# EAGLE board teensyMotors02_upSwitch_LED_SX (EAGLE 9.5.2)
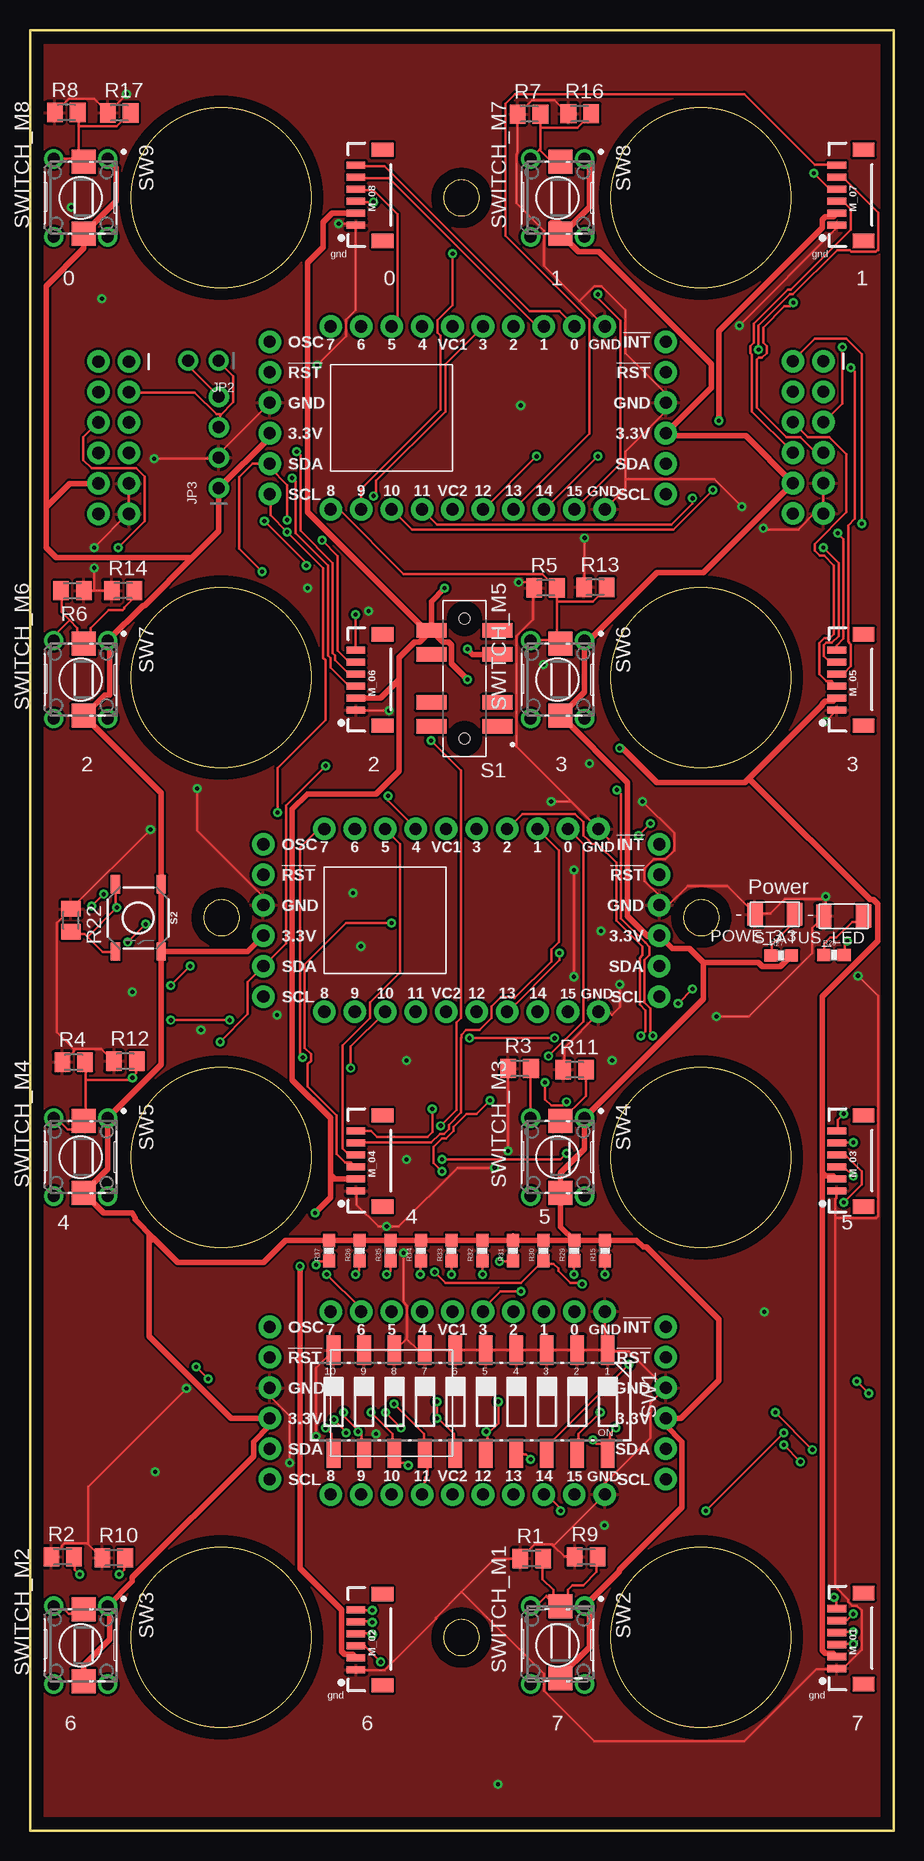
[diagram p0: board, top side]
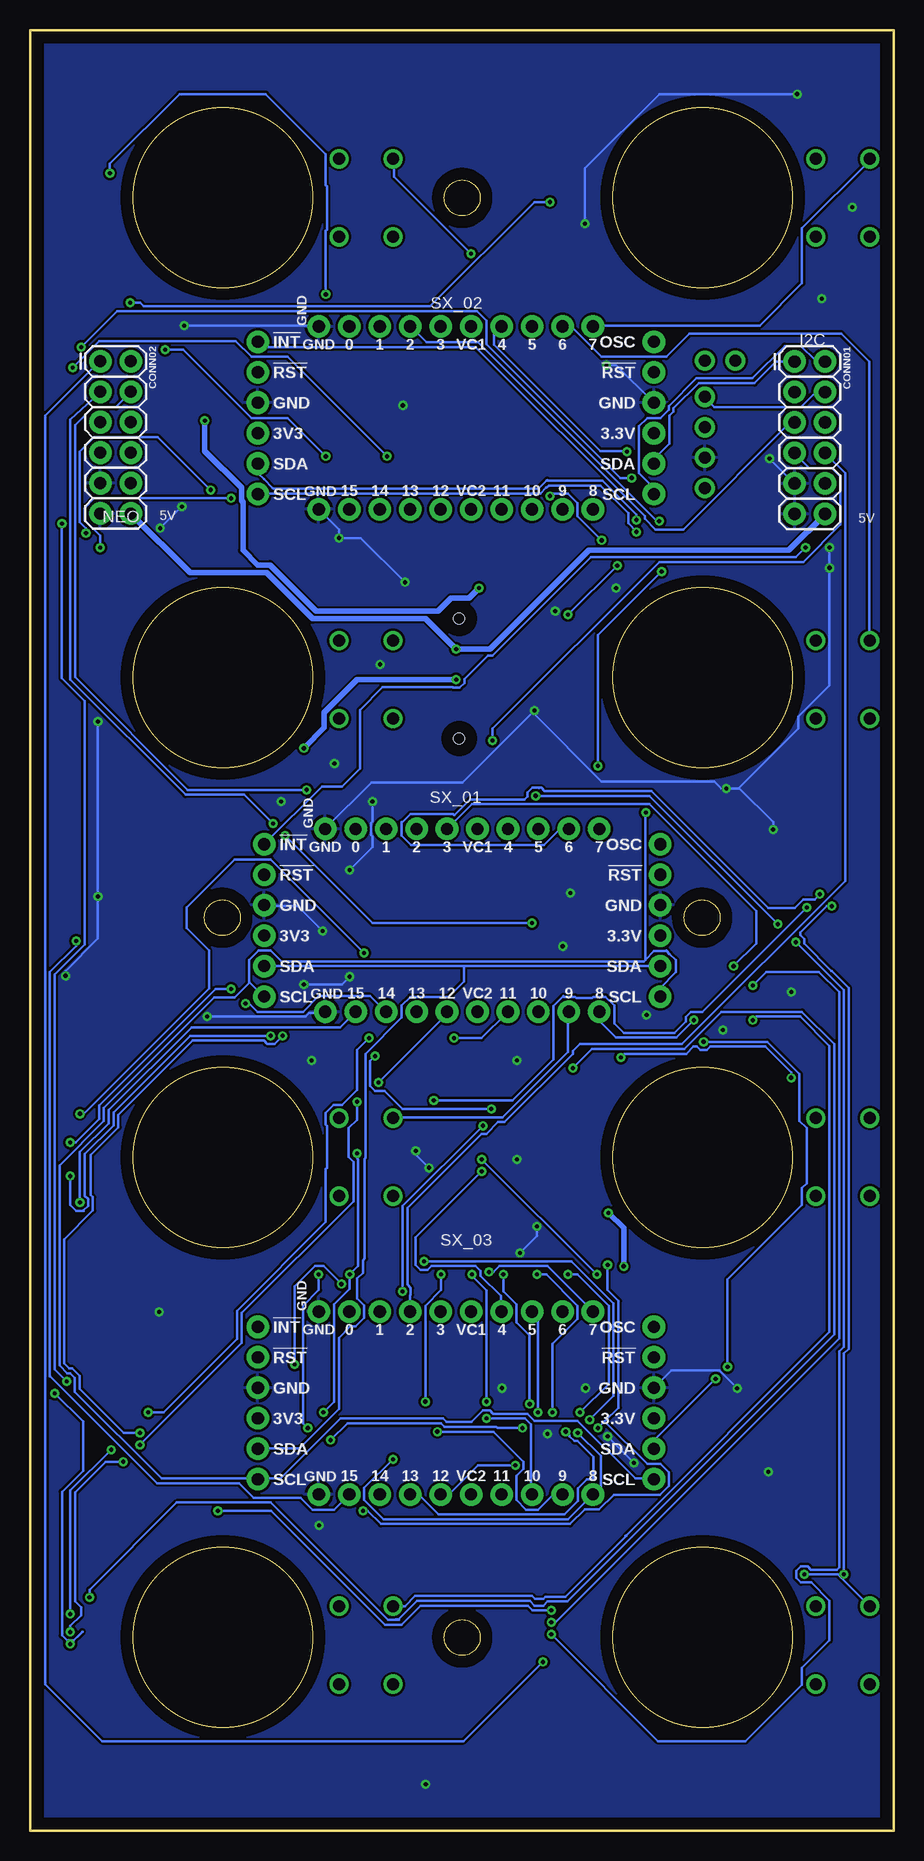
[diagram p1: board, bottom side, seen from below]

Size 72.01 x 150.09 mm. Coordinates in mm from the lower left corner, seen from the top.
Outline: 35.97,14.59 arc180 35.97,17.59 arc180 35.97,14.59
Outline: 15.97,74.59 arc180 15.97,77.59 arc180 15.97,74.59
Outline: 35.97,134.59 arc180 35.97,137.59 arc180 35.97,134.59
Outline: 55.97,74.59 arc180 55.97,77.59 arc180 55.97,74.59
Outline: 72.01,150.09 72.01,0 0,0 0,150.09 72.01,150.09
Outline: circle at 55.94,136.11 radius 7.49
Outline: circle at 55.94,96.11 radius 7.49
Outline: circle at 55.94,56.11 radius 7.49
Outline: circle at 55.94,16.11 radius 7.49
Outline: circle at 15.94,16.11 radius 7.49
Outline: circle at 15.94,56.11 radius 7.49
Outline: circle at 15.94,96.11 radius 7.49
Outline: circle at 15.94,136.11 radius 7.49
Copper layers (1*16): Top 0.035mm / dielectric 1.5mm / Bottom 0.035mm
Design rules "default": minimum track width 6mil, minimum drill 0.35mm, track to track 6mil, track to pad 6mil, pad to pad 6mil, via to via 6mil, smd to smd 6mil, copper to edge 40mil, drill to drill 6mil, minimum pad ring 10mil, minimum via ring 8mil, stop-mask expansion 4mil, vias tented up to drill 0mil, thermal gap 10mil
Net classes: 0 default: width 0.2 mm, clearance 0.2 mm; 1 gnd: width 0.2 mm, clearance 0.2 mm; 2 3v: width 0.45 mm, clearance 0.2 mm; 4 5v: width 0.45 mm, clearance 0.2 mm

## Footprints (pad centres in the part's own frame; a part is rotated, then mirrored left to right if it is on the bottom)
2X6 = drill 1.016 pad 1.88: 1 0,0; 2 0,2.54; 3 2.54,0; 4 2.54,2.54; 5 5.08,0; 6 5.08,2.54; 7 7.62,0; 8 7.62,2.54; 9 10.16,0; 10 10.16,2.54; 11 12.7,0; 12 12.7,2.54
1X02_ROUND = drill 1 pad 1.676: 1 -1.27,0; 2 1.27,0
1X04_ROUND = drill 1 pad 1.676: 1 -3.81,0; 2 -1.27,0; 3 1.27,0; 4 3.81,0
1X06-1MM = smd 0.6 x 1.55: 1 -2.54,1.27; 2 -1.54,1.27; 3 -0.54,1.27; 4 0.46,1.27; 5 1.46,1.27; 6 2.46,1.27 | smd 1.2 x 1.8: P$1 -3.84,-0.955; P$2 3.76,-0.955
LED1206FAB = smd 1.27 x 1.905: 1 -1.651,0; 2 1.651,0
M0805 = smd 1.3 x 1.6: 1 -0.95,0; 2 0.95,0
0603-RES = smd 1.1 x 1: 1 -0.85,0; 2 0.85,0
SW_JS207011SCQNR = smd 2.5 x 1.2: 1 -2.75,4; 2 -2.75,2; 3 -2.75,-2; 4 -2.75,-4; 5 2.75,4; 6 2.75,2; 7 2.75,-2; 8 2.75,-4 | hole 0.9: 0,5; 0,-5
TACTILE_SWITCH_SMD_5.2MM = smd 1.524 x 0.762: 1 -2.794,1.905; 2 2.794,1.905; 3 -2.794,-1.905; 4 2.794,-1.905
CTS-219-10 = smd 1.13 x 2.44: 1 -11.43,-4.3; 2 -8.89,-4.3; 3 -6.35,-4.3; 4 -3.81,-4.3; 5 -1.27,-4.3; 6 1.27,-4.3; 7 3.81,-4.3; 8 6.35,-4.3; 9 8.89,-4.3; 10 11.43,-4.3; 11 11.43,4.3; 12 8.89,4.3; 13 6.35,4.3; 14 3.81,4.3; 15 1.27,4.3; 16 -1.27,4.3; 17 -3.81,4.3; 18 -6.35,4.3; 19 -8.89,4.3; 20 -11.43,4.3
B3F-1000 = drill 1 pad 1.6: 1 -3.25,2.25; 2 3.25,2.25; 3 -3.25,-2.25; 4 3.25,-2.25
DTSM-3 = smd 2 x 2: 1 -3,0; 2 3,0
SX1509_HOLE = drill 1.016 pad 1.88: 0 -7.62,7.62; 1 -7.62,5.08; 2 -7.62,2.54; 3 -7.62,0; 3.3V 1.27,-17.78; 3.3V_2 1.27,15.24; 4 -7.62,-5.08; 5 -7.62,-7.62; 6 -7.62,-10.16; 7 -7.62,-12.7; 8 7.62,-12.7; 9 7.62,-10.16; 10 7.62,-7.62; 11 7.62,-5.08; 12 7.62,0; 13 7.62,2.54; 14 7.62,5.08; 15 7.62,7.62; GND -1.27,-17.78; GND_1 7.62,10.16; GND_2 -7.62,10.16; GND_3 -1.27,15.24; INT -6.35,15.24; OSC -6.35,-17.78; RST -3.81,-17.78; RST_2 -3.81,15.24; SCL 6.35,-17.78; SCL_2 6.35,15.24; SDA 3.81,-17.78; SDA_2 3.81,15.24; VC2 7.62,-2.54; VCC1 -7.62,-2.54

## Placement (x,y rotation side)
CONN01  2X6 FEMALE  [2X6]  8.25,122.45 270 bottom
CONN02  2X6 FEMALE  [2X6]  66.15,122.48 270 bottom
JP2  [1X02_ROUND]  14.45,122.53 180 top
JP3  [1X04_ROUND]  15.75,115.7 90 top
M_01  [1X06-1MM]  68.54,16.05 90 top
M_02  [1X06-1MM]  28.44,15.95 90 top
M_03  [1X06-1MM]  68.54,55.85 90 top
M_04  [1X06-1MM]  28.44,55.85 90 top
M_05  [1X06-1MM]  68.54,95.95 90 top
M_06  [1X06-1MM]  28.44,95.95 90 top
M_07  [1X06-1MM]  68.54,136.35 90 top
M_08  [1X06-1MM]  28.44,136.35 90 top
POWE_3.3  LEDFAB1206  [LED1206FAB]  62.1,76.38 180 top
R1  10k  [M0805]  41.83,22.67 0 top
R2  10k  [M0805]  2.73,22.83 0 top
R3  10k  [M0805]  40.82,63.54 0 top
R4  10K  [M0805]  3.64,64.05 0 top
R5  10k  [M0805]  42.98,103.58 0 top
R6  10k  [M0805]  3.54,103.35 180 top
R7  10k  [M0805]  41.61,143.08 0 top
R8  10k  [M0805]  3.03,143.21 0 top
R9  10K  [M0805]  46.38,22.81 0 top
R10  10K  [M0805]  6.99,22.73 0 top
R11  10K  [M0805]  45.42,63.42 0 top
R12  10K  [M0805]  7.95,64.13 0 top
R13  10K  [M0805]  47.14,103.63 0 top
R14  10K  [M0805]  7.77,103.35 0 top
R15  10K  [0603-RES]  47.93,48.35 90 top
R16  10K  [M0805]  45.85,143.1 0 top
R17  10K  [M0805]  7.44,143.18 0 top
R22  10K  [M0805]  3.41,75.88 270 top
R27  500  [0603-RES]  62.64,72.95 0 top
R28  500  [0603-RES]  67.03,73 0 top
R29  10K  [0603-RES]  45.38,48.35 90 top
R30  10K  [0603-RES]  42.82,48.35 90 top
R31  10K  [0603-RES]  40.27,48.35 90 top
R32  10K  [0603-RES]  37.71,48.35 90 top
R33  10K  [0603-RES]  35.16,48.35 90 top
R34  10K  [0603-RES]  32.61,48.35 90 top
R35  10K  [0603-RES]  30.05,48.35 90 top
R36  10K  [0603-RES]  27.5,48.35 90 top
R37  10K  [0603-RES]  24.94,48.35 90 top
S1  JS207011SCQNR  [SW_JS207011SCQNR]  36.22,96.04 180 top
S2  [TACTILE_SWITCH_SMD_5.2MM]  9.03,76.08 270 top
STATUS_LED  LEDFAB1206  [LED1206FAB]  67.84,76.23 180 top
SW1  219-10  [CTS-219-10]  36.74,35.74 180 top
SW2  B3F-1000  [B3F-1000]  43.99,15.46 270 top
SW3  B3F-1000  [B3F-1000]  4.23,15.46 270 top
SW4  B3F-1000  [B3F-1000]  43.99,56.13 270 top
SW5  B3F-1000  [B3F-1000]  4.23,56.13 270 top
SW6  B3F-1000  [B3F-1000]  43.99,95.94 270 top
SW7  B3F-1000  [B3F-1000]  4.23,95.94 270 top
SW8  B3F-1000  [B3F-1000]  43.99,136.09 270 top
SW9  B3F-1000  [B3F-1000]  4.23,136.09 270 top
SWITCH_M1  DTSM-3  [DTSM-3]  44.24,15.7 90 top
SWITCH_M2  DTSM-3  [DTSM-3]  4.48,15.46 90 top
SWITCH_M3  DTSM-3  [DTSM-3]  44.24,56.13 90 top
SWITCH_M4  DTSM-3  [DTSM-3]  4.48,56.13 90 top
SWITCH_M5  DTSM-3  [DTSM-3]  44.24,95.94 90 top
SWITCH_M6  DTSM-3  [DTSM-3]  4.48,95.94 90 top
SWITCH_M7  DTSM-3  [DTSM-3]  44.24,136.09 90 top
SWITCH_M8  DTSM-3  [DTSM-3]  4.48,136.09 90 top
U$1  SX1509HOLE  [SX1509_HOLE]  37.24,75.87 270 top
U$2  SX1509HOLE  [SX1509_HOLE]  37.77,117.75 270 top
U$3  SX1509HOLE  [SX1509_HOLE]  37.77,35.64 270 top

## Library data of the parts
CONN01 CONN02 = SparkFun-Connectors; PROD_ID: CONN-12423
JP2 JP3 = microbuilder
M_01-M_08 = SparkFun-Connectors; PROD_ID: CONN-08249; SF_ID: GPS-00579
POWE_3.3 STATUS_LED = fab
R1-R14 R16 R17 R22 = resistor
R15 R27-R37 = SparkFun-Resistors; PROD_ID: RES-00824
S1 = JS207011SCQNR; AVAILABILITY: Unavailable; DESCRIPTION: Slide Switch DP3T Surface Mount; MF: C&K; MP: JS207011SCQNR; PACKAGE: None; PRICE: None
S2 = SparkFun-Switches; PROD_ID: SWCH-08247; SF_SKU: COM-08720
SW1 = switch-dil; MF: SLI (CML/IDI); MPN: 219-10PK; OC_FARNELL: unknown; OC_NEWARK: 19M0224
SW2-SW9 = Switch; CREATED_BY: PCBLayout.com; DIGI_KEY_PART_NUMBER: SW400-ND; MANUFACTURER: Omron Electronics Inc-EMC Div; MPN: B3F-1000; PACKAGE: SPST-NO
SWITCH_M1-SWITCH_M8 = switch-tact
U$1-U$3 = SX1509_s

## Nets
0_SX1: M_04.6 U$1.0
0_SX2: M_08.6 U$2.0
0_SX3: U$3.0
1_SX1: M_04.5 U$1.1
1_SX2: M_08.5 U$2.1
1_SX3: U$3.1
2_SX1: M_02.6 U$1.2
2_SX2: M_06.6 U$2.2
2_SX3: CONN01.8 U$3.2
3.3V [3v]: CONN01.10 CONN02.10 JP3.1 R15.2 R27.2 R29.2 R30.2 R31.2 R32.2 R33.2 R34.2 R35.2 R36.2 R37.2 S2.1 S2.2 SW2.1 SW3.1 SW4.1 SW5.1 SW6.1 SW7.1 SW8.1 SW9.1 SWITCH_M1.1 SWITCH_M2.1 SWITCH_M3.1 SWITCH_M4.1 SWITCH_M5.1 SWITCH_M6.1 SWITCH_M7.1 SWITCH_M8.1 U$1.3.3V U$1.3.3V_2 U$2.3.3V U$2.3.3V_2 U$3.3.3V U$3.3.3V_2
3_SX1: M_02.5 U$1.3
3_SX2: M_06.5 U$2.3
3_SX3: CONN01.7 U$3.3
4_SX1: M_02.4 U$1.4
4_SX2: M_06.4 U$2.4
4_SX3: R22.2 S2.3 S2.4 U$3.4
5_SX1: M_04.4 U$1.5
5_SX2: M_08.4 U$2.5
5_SX3: R15.1 SW1.20 U$3.5
6_SX1: R2.2 R10.2 SW3.3 SWITCH_M2.2 U$1.6
6_SX2: R6.2 R14.2 SW7.3 SWITCH_M6.2 U$2.6
6_SX3: R29.1 SW1.19 U$3.6
7_SX1: R4.2 R12.2 SW5.3 SWITCH_M4.2 U$1.7
7_SX2: R8.2 R17.2 SW9.3 SWITCH_M8.2 U$2.7
7_SX3: R30.1 SW1.18 U$3.7
8_SX1: R1.2 R9.2 SW2.3 SWITCH_M1.2 U$1.8
8_SX2: R5.2 R13.2 SW6.3 SWITCH_M5.2 U$2.8
8_SX3: R31.1 SW1.17 U$3.8
9_SX1: R3.2 R11.2 SW4.3 SWITCH_M3.2 U$1.9
9_SX2: R7.2 R16.2 SW8.3 SWITCH_M7.2 U$2.9
9_SX3: R32.1 SW1.16 U$3.9
10_SX1: M_01.6 U$1.10
10_SX2: M_05.6 U$2.10
10_SX3: R33.1 SW1.15 U$3.10
11_SX1: M_01.5 U$1.11
11_SX2: M_05.5 U$2.11
11_SX3: R34.1 SW1.14 U$3.11
12_SX1: M_01.4 U$1.12
12_SX2: M_05.4 U$2.12
12_SX3: R35.1 SW1.13 U$3.12
13_SX1: M_03.6 U$1.13
13_SX2: M_07.6 U$2.13
13_SX3: R36.1 SW1.12 U$3.13
14_SX1: M_03.5 U$1.14
14_SX2: M_07.5 U$2.14
14_SX3: R37.1 SW1.11 U$3.14
15_SX1: M_03.4 U$1.15
15_SX2: M_07.4 U$2.15
15_SX3: R28.2 U$3.15
CAN_RX2: CONN01.4 JP2.2 JP3.4
CAN_TX2: CONN01.3 JP2.1 JP3.3
GND_MCU: CONN01.9 CONN01.11 CONN02.9 CONN02.11 JP3.2 M_01.1 M_02.1 M_03.1 M_04.1 M_05.1 M_06.1 M_07.1 M_08.1 POWE_3.3.2 R1.1 R2.1 R3.1 R4.1 R5.1 R6.1 R7.1 R8.1 R9.1 R10.1 R11.1 R12.1 R13.1 R14.1 R16.1 R17.1 R22.1 STATUS_LED.2 SW1.1 SW1.2 SW1.3 SW1.4 SW1.5 SW1.6 SW1.7 SW1.8 SW1.9 SW1.10 U$1.GND U$1.GND_1 U$1.GND_2 U$1.GND_3 U$2.GND U$2.GND_1 U$2.GND_2 U$2.GND_3 U$3.GND U$3.GND_1 U$3.GND_2 U$3.GND_3
INT_01: CONN01.6 U$1.INT
INT_02: CONN01.5 U$2.INT
N$1: S1.7
N$13: R28.1 STATUS_LED.1
N$25: U$3.INT
N$193: POWE_3.3.1 R27.1
NEOPIXEL_01: CONN02.2 M_01.3
NEOPIXEL_02: CONN02.1 M_02.3
NEOPIXEL_03: CONN02.4 M_03.3
NEOPIXEL_04: CONN02.3 M_04.3
NEOPIXEL_05: CONN02.6 M_05.3
NEOPIXEL_06: CONN02.5 M_06.3
NEOPIXEL_07: CONN02.8 M_07.3
NEOPIXEL_08: CONN02.7 M_08.3
SCL_00: CONN01.2 U$1.SCL U$1.SCL_2 U$2.SCL U$2.SCL_2 U$3.SCL U$3.SCL_2
SDA_00: CONN01.1 U$1.SDA U$1.SDA_2 U$2.SDA U$2.SDA_2 U$3.SDA U$3.SDA_2
VCC_5V [5v]: M_01.2 M_02.2 M_03.2 M_04.2 M_05.2 M_06.2 M_07.2 M_08.2 S1.8
VCC_5V_IN [5v]: CONN01.12 CONN02.12 S1.3

## Tracks (layer width: path | path; a pad name or v marks a point on that pad's centre or on a via)
0_SX1  (via drill 0.35)
  Top 0.2: v43.24,64.55 46.14,67.45 46.14,82.25 44.94,83.45 U$1.0 | v33.54,60.15 33.54,58.25 33.13,57.84 28.92,57.84 28.44,58.31 M_04.6
  Bottom 0.2: v33.54,60.15 40.94,60.15 42.44,61.65 43.24,61.65 43.64,62.05 43.64,64.15 v43.24,64.55
0_SX2
  Top 0.2: M_08.6 27.24,138.75 29.54,138.75 41.64,126.65 44.14,126.65 45.34,125.45 U$2.0
1_SX1
  Top 0.2: M_04.5 27.24,57.35 33.45,57.35 34.17,58.07 34.53,58.07 34.92,58.47 34.92,58.82 35.94,59.85 35.94,66.07 35.97,66.09 35.97,66.33 36.36,66.73 37.47,66.73 38.48,67.74 38.48,68.7 39.26,69.49 40.29,69.49 40.4,69.38 43.47,72.45 43.47,73.43 44.09,74.06 44.09,81.71 U$1.1 42.24,83.45
1_SX2
  Top 0.2: M_08.5 27.24,137.75 29.94,137.75 42.24,125.45 42.84,125.45 U$2.1
2_SX1  (via drill 0.35)
  Top 0.2: v28.54,18.35 27.24,18.35 M_02.6 | v62.84,33.15 v56.34,26.65 | U$1.2 39.84,83.55 41.04,84.75 45.44,84.75 46.14,84.05 46.14,82.95 46.54,82.55 46.58,82.55 46.88,82.25 47.33,82.25 48.88,80.7 48.88,75.87 51.08,73.67 51.08,72.98 50.84,72.74 50.84,68.84 51.31,68.36 51.31,66.62 v50.94,66.25
  Bottom 0.2: v28.54,18.35 30.1,18.35 30.5,18.75 39.44,18.75 41.04,17.15 42.41,17.15 51.91,26.65 v56.34,26.65 | v62.84,33.15 64.19,33.15 67.87,36.82 67.87,37.9 68.5,38.53 68.72,38.53 69.14,38.95 69.14,49.3 66.77,51.67 66.77,52.8 66.95,52.99 66.95,56.31 64.64,58.62 64.64,59.65 58.44,65.85 52.5,65.85 52.23,65.57 51.62,65.57 v50.94,66.25
2_SX2  (via drill 0.35)
  Top 0.2: v27.14,101.35 27.14,98.45 M_06.6 | v23.04,105.45 23.04,105.65 v19.54,109.15
  Bottom 0.2: v23.04,105.45 v27.14,101.35 | v19.54,109.15 19.74,109.15 34.64,124.05 38.94,124.05 40.24,125.35 U$2.2
2_SX3
  Bottom 0.2: CONN01.8 5.64,114.75 4.04,113.15 4.04,79.15 17.64,65.55 26.16,65.55 26.74,64.97 26.74,64.75 32.44,59.05 32.99,59.05 33.96,58.07 34.36,58.07 40.54,51.88 40.54,45.51 40.27,45.23 40.27,44.67 40.31,44.63 U$3.2 40.24,43.35
3.3V
  Top 0.45: SWITCH_M2.1 4.48,13.78 6.63,15.93 6.63,18.56 SW3.1 8.54,20.76 8.54,21.11 18.63,31.2 18.63,32.39 19.99,33.76 U$3.3.3V 16.76,34.37 9.95,41.18 9.95,49.25 | 40.27,49.56 39.9,49.2 R32.2 R33.2 R34.2 R35.2 R36.2 R37.2 21.3,49.2 19.47,47.37 12.32,47.37 10.29,49.39 | 40.28,49.58 40.27,49.56 | 40.27,49.56 R31.2 R30.2 R29.2 | R29.2 R15.2 50.57,49.2 51.13,48.65 51.38,48.65 57.43,42.6 57.43,37.52 54.28,34.37 U$3.3.3V_2 53.01,33.76 54.37,32.39 54.37,26.95 49.16,21.73 49.16,21.62 SW2.1 46.63,18.31 46.63,15.29 44.24,12.9 SWITCH_M1.1 | R29.2 44.24,50.33 SWITCH_M3.1 44.24,54.81 46.24,56.81 SW4.1 56.16,69.3 56.16,72.36 | 4.09,53.39 4.35,53.13 SWITCH_M4.1 | SWITCH_M4.1 6.48,55.13 SW5.1 10.94,63.84 S2.2 | 56.16,72.36 54.99,73.52 53.55,73.52 52.54,74.54 | U$1.3.3V_2 52.54,74.54 | 56.16,72.36 60.72,72.36 61.06,72.02 62.56,72.02 R27.2 | S2.2 S2.1 10.94,86.48 SWITCH_M6.1 6.21,94.67 6.63,94.67 6.63,99.04 SW7.1 9.42,102.13 9.55,102.13 13.52,106.1 | S2.2 18.14,73.28 U$1.3.3V | SWITCH_M5.1 44.26,92.92 | 44.26,92.92 49.81,87.37 49.81,76.25 51.52,74.54 52.54,74.54 | 13.52,106.1 15.75,108.33 JP3.1 19.99,116.13 U$2.3.3V | 13.52,106.1 2.18,106.1 1.34,106.94 1.34,110.33 | CONN01.10 3.3,112.29 1.34,110.33 | 44.26,92.92 46.24,94.91 SW6.1 46.61,99.19 52.27,104.84 56.13,104.84 CONN02.10 59.67,116.26 53.24,116.26 U$2.3.3V_2 56.79,120.27 56.79,122.25 47.43,131.62 45.74,131.62 45.02,132.34 45.02,133.11 44.61,133.52 | 43.46,134.04 44.09,134.04 44.61,133.52 | SW9.1 7.2,138.62 7.2,135.81 SWITCH_M8.1 4.48,131.89 1.34,128.75 1.34,110.33 | SW8.1 46.63,138.95 46.63,135.31 44.42,133.09 SWITCH_M7.1 44.74,133.65 44.61,133.52
  Top 0.45: SWITCH_M4.1 6.13,51.49 8.51,51.49 8.52,51.48 8.75,51.07 8.75,50.93 10.29,49.39 | 9.95,49.25 9.95,49.72 | 9.95,49.25 10.14,49.25 10.29,49.39
3_SX1  (via drill 0.35)
  Top 0.2: v28.54,17.35 28.44,17.45 27.24,17.45 M_02.5 | v13.34,72.05 v11.74,70.45
  Bottom 0.2: v28.54,17.35 28.21,17.35 4.54,41.02 4.54,69.88 6.23,71.57 10.62,71.57 v11.74,70.45 | U$1.3 37.14,83.55 35.14,85.55 20.34,85.55 11.44,76.65 11.44,73.96 v13.34,72.05
3_SX2  (via drill 0.35)
  Top 0.2: v24.34,107.55 25.64,106.25 25.64,98.35 26.54,97.45 27.14,97.45 M_06.5 | 37.74,125.35 U$2.3 34.63,122.23 34.63,118.29 28.85,112.51 28.85,111.46 v28.64,111.25
  Bottom 0.2: v24.34,107.55 26.34,109.55 26.34,110.65 27.14,111.45 28.44,111.45 v28.64,111.25
3_SX3  (via drill 0.35)
  Top 0.2: v40.94,44.95 39.24,44.95 37.84,43.55 37.84,43.35 U$3.3 | v34.24,58.75 35.54,60.05 35.54,67.34 35.94,67.74 35.94,88.36 v33.44,90.85
  Bottom 0.2: v40.94,44.95 40.94,52.05 v34.24,58.75 | v33.44,90.85 33.44,91.85 19.54,105.75 7.54,105.75 4.44,108.85 4.44,112.85 5.14,113.55 7.04,113.55 8.24,114.75 CONN01.7
4_SX1  (via drill 0.35)
  Top 0.2: v28.54,16.35 28.44,16.45 27.24,16.45 M_02.4 | v9.64,75.55 v8.14,74.05 | v29.84,86.25 29.84,85.85 32.14,83.55 U$1.4
  Bottom 0.2: v28.54,16.35 19.64,7.45 12.34,7.45 7.64,12.15 7.64,13.55 5.34,15.85 5.34,19.15 6.87,20.67 7.73,20.67 8.12,21.07 8.12,21.63 7.73,22.03 7.16,22.03 6.89,21.75 4.72,21.75 4.54,21.93 4.54,39.93 4.14,40.33 4.14,70.05 v8.14,74.05 | v9.64,75.55 20.34,86.25 v29.84,86.25
4_SX2  (via drill 0.35)
  Top 0.2: v22.24,114.95 22.54,114.65 22.54,108.35 25.24,105.65 25.24,98.15 25.44,97.95 25.44,97.55 26.54,96.45 27.14,96.45 M_06.4
  Bottom 0.2: U$2.4 33.32,124.74 33.32,123.86 24.45,114.99 22.28,114.99 v22.24,114.95
4_SX3  (via drill 0.35)
  Top 0.2: 4.79,74.5 4.54,74.75 3.54,74.75 3.44,74.85 R22.2 | 4.79,74.5 6.04,73.25 7.04,73.25 S2.4 | 7.14,76.95 7.14,76.85 4.79,74.5 | 7.14,76.95 7.14,78.85 S2.3 | 33.64,55.65 33.65,55.65 | 33.65,55.65 v34.34,54.95 | 38.24,60.85 v38.34,60.85 37.23,59.74 36.41,59.74 35.32,58.66 35.32,58.3 34.69,57.67 34.34,57.67 33.65,56.98 33.65,55.65 | 7.14,76.95 v7.24,76.95
  Bottom 0.2: v34.34,54.95 39.84,49.45 39.84,47.15 39.44,46.75 38.84,46.75 38.54,47.05 34.84,47.05 34.44,46.65 34.44,46.25 32.74,44.55 32.74,43.35 U$3.4 | v38.34,60.85 31.78,60.85 28.34,64.28 28.34,68.75 27.54,69.55 27.48,69.49 26.56,69.49 26.45,69.38 25.16,69.38 25.05,69.49 24.02,69.49 23.3,68.76 23.3,67.28 22.5,66.49 18.27,66.49 17.32,67.44 17.32,67.83 16.93,68.23 15.97,68.23 v7.24,76.95
5_SX1
  Top 0.2: M_04.4 27.14,56.35 26.54,56.35 26.04,56.85 26.04,65.45 28.34,67.75 28.34,69.04 30.84,71.54 30.84,82.25 29.64,83.45 U$1.5
5_SX2
  Top 0.2: M_08.4 27.24,136.75 28.64,136.75 30.64,134.75 30.64,125.85 30.24,125.45 U$2.5
5_SX3  (via drill 0.35)
  Top 0.2: v47.94,46.35 47.94,47.45 R15.1 | v48.84,33.55 48.34,33.05 48.34,32.25 | 48.34,32.25 48.34,31.55 48.24,31.45 SW1.20 48.34,32.25 | v30.94,33.55 v29.64,34.85 | v46.94,32.55 47.24,32.25 48.34,32.25
  Bottom 0.2: v47.94,46.35 47.94,45.05 49.24,43.75 49.24,33.95 v48.84,33.55 | U$3.5 29.64,42.75 v29.64,34.85 | v30.94,33.55 33.04,33.55 33.14,33.65 37.44,33.65 37.74,33.95 45.54,33.95 v46.94,32.55
6_SX1  (via drill 0.35)
  Top 0.2: v7.44,21.35 7.84,21.75 7.84,22.65 R10.2 | v4.14,21.35 3.74,21.75 3.74,22.75 R2.2 | SWITCH_M2.2 4.44,18.45 3.74,18.45 3.34,18.05 3.24,18.05 2.64,18.65 2.04,18.65 SW3.3 | v5.14,77.05 v6.14,78.05
  Bottom 0.2: v7.44,21.35 4.64,21.35 4.39,21.1 | 4.39,21.1 2.04,18.75 SW3.3 | 4.39,21.1 v4.14,21.35 4.14,39.77 3.74,40.17 3.74,70.25 5.14,71.65 5.18,71.65 7.47,73.94 7.47,74.33 7.77,74.64 7.77,74.86 5.58,77.05 v5.14,77.05 | 41.04,84.05 41.04,83.87 | 41.04,83.87 41.04,82.95 40.24,82.15 29.14,82.15 27.84,83.45 27.14,83.45 U$1.6 | 41.04,83.87 41.02,83.9 41.02,84 40.29,84.73 36.72,84.73 36.64,84.65 36.61,84.65 35.31,85.95 30.76,85.95 30.52,86.19 30.52,86.53 30.13,86.93 29.56,86.93 | 29.56,86.93 29.55,86.92 | 29.56,86.93 29.37,86.93 29.09,86.65 20.18,86.65 10.43,76.9 8.26,76.9 7.53,77.63 6.57,77.63 v6.14,78.05
6_SX2
  Top 0.2: 3.29,100.9 3.94,100.25 3.94,99.45 4.44,98.95 SWITCH_M6.2 4.34,99.15 5.04,99.85 5.04,100.25 6.54,101.75 7.74,101.75 7.84,101.85 7.84,101.95 8.64,102.75 8.64,103.35 R14.2 | 3.29,100.9 2.64,101.55 2.64,103.35 R6.2 | 3.29,100.9 2.04,99.65 2.04,99.25 SW7.3
  Bottom 0.2: U$2.6 27.54,125.35 26.84,125.35 24.34,122.85 18.95,122.85 17.01,124.79 4.37,124.79 2.04,122.46 2.04,99.25 SW7.3
6_SX3  (via drill 0.35)
  Top 0.2: v45.34,46.35 45.34,47.45 R29.1 | v47.54,34.85 45.74,33.05 45.74,31.55 SW1.19 | v24.74,46.35 27.54,43.55 27.54,43.35 U$3.6 | v34.34,55.95 44.24,55.95 v44.74,56.45
  Bottom 0.2: v47.54,34.85 46.64,35.75 46.64,43.85 45.34,45.15 v45.34,46.35 44.64,47.05 44.64,55.95 44.74,56.05 v44.74,56.45 | v34.34,55.95 v24.74,46.35
7_SX1  (via drill 0.35)
  Top 0.2: 4.64,62.55 4.64,59.25 4.54,59.15 SWITCH_M4.2 4.44,59.05 3.84,58.45 3.14,58.45 2.24,59.35 2.04,59.35 SW5.3 | 4.64,62.55 4.64,64.05 R4.2 | 8.49,62.8 8.24,62.55 4.64,62.55 | 8.49,62.8 8.84,63.15 8.84,64.05 R12.2 | v8.54,62.75 8.49,62.8 | U$1.7 24.05,83.49 22.5,81.95 22.5,64.82 22.74,64.58 v22.74,64.45
  Bottom 0.2: v22.74,64.45 22.44,64.75 17.28,64.75 16.68,65.35 16.4,65.35 16.13,65.07 15.56,65.07 15.29,65.35 10.71,65.35 8.54,63.18 v8.54,62.75
7_SX2
  Top 0.2: 4.04,142.05 4.04,139.55 4.44,139.15 SWITCH_M8.2 4.14,139.35 2.04,139.35 SW9.3 | 4.04,142.05 4.04,143.15 R8.2 | 4.04,142.05 7.24,142.05 8.34,143.15 R17.2
  Bottom 0.2: U$2.7 25.04,125.45 11.17,125.45 7.64,128.98 7.64,133.55 1.94,139.25 SW9.3
7_SX3  (via drill 0.35)
  Top 0.2: v33.74,46.55 34.64,45.65 40.94,45.65 42.74,47.45 R30.1 42.84,47.45 43.04,47.25 43.64,47.25 44.04,46.85 44.04,46.65 45.04,45.65 45.94,45.65 v46.04,45.55 | v49.94,38.85 43.14,32.05 43.14,31.45 SW1.18
  Bottom 0.2: v33.74,46.55 33.34,46.55 32.84,47.05 28.84,47.05 25.14,43.35 U$3.7 | v49.94,38.85 49.94,45.35 48.24,47.05 47.54,47.05 v46.04,45.55
8_SX1  (via drill 0.35)
  Top 0.2: 43.64,19.35 43.64,19.25 44.14,18.75 SWITCH_M1.2 | 43.64,19.35 43.64,20.05 42.74,20.95 42.74,22.65 R1.2 | R9.2 47.24,22.75 47.24,21.55 46.14,20.45 45.24,20.45 44.84,20.05 44.84,19.55 44.14,18.85 SWITCH_M1.2 | 43.64,19.35 43.24,19.35 43.04,19.55 42.24,18.75 41.74,18.75 SW2.3 | 43.64,19.35 SWITCH_M1.2 | v11.74,67.55 v16.64,67.55
  Bottom 0.2: 22.34,24.55 22.29,24.6 | 22.29,24.6 5.34,41.55 5.34,65.39 7.8,67.85 11.44,67.85 v11.74,67.55 | 24.44,68.15 U$1.8 24.54,67.49 23.14,66.09 18.1,66.09 v16.64,67.55 | SW2.3 40.75,18.71 39.91,19.55 30.17,19.55 29.92,19.3 29.22,19.3 29.02,19.5 27.36,19.5 22.29,24.57 22.29,24.6
8_SX2
  Top 0.2: 43.94,99.25 43.94,99.15 44.14,98.95 SWITCH_M5.2 43.94,99.25 | 43.94,99.25 43.94,102.45 | 43.94,102.45 43.94,103.55 R5.2 43.84,103.65 42.74,104.75 31.14,104.75 25.84,110.05 25.14,110.05 U$2.8 | 43.94,102.45 46.94,102.45 48.04,103.55 R13.2 | 43.94,99.25 41.74,99.25 SW6.3
8_SX3  (via drill 0.35)
  Top 0.2: v39.14,47.45 40.24,47.45 R31.1 | v25.34,34.25 26.34,33.25 v26.34,33.15 | v41.74,30.95 41.34,31.35 40.64,31.35 SW1.17
  Bottom 0.2: v39.14,47.45 26.84,47.45 23.34,43.95 23.34,36.25 v25.34,34.25 | 25.14,28.05 U$3.8 | v41.74,30.95 44.14,28.55 44.14,27.55 42.54,25.95 27.14,25.95 25.14,27.95 U$3.8 | v26.34,33.15 24.41,31.22 24.41,28.68 U$3.8
9_SX1
  Top 0.2: R11.2 46.34,63.35 46.34,61.25 44.24,59.15 SWITCH_M3.2 44.14,59.15 42.14,59.15 41.84,59.45 SW4.3 41.74,59.45 41.74,63.45 R3.2
  Bottom 0.2: U$1.9 27.14,68.15 27.14,64.92 32.61,59.45 41.64,59.45 SW4.3
9_SX2  (via drill 0.35)
  Top 0.2: 42.54,141.95 42.54,140.15 42.49,140.1 | 42.54,141.95 42.54,143.05 R7.2 | 42.49,140.1 SW8.3 | 42.54,141.95 45.64,141.95 46.74,143.05 R16.2 | 42.49,140.1 43.44,139.15 44.14,139.15 SWITCH_M7.2 | 27.64,110.15 U$2.9 27.58,110.16 27.58,111.81 34.23,118.45 34.23,124.62 33.99,124.86 33.99,125.89 35.24,127.14 v35.24,131.45
  Bottom 0.2: v35.24,131.45 41.64,137.85 41.64,139.25 SW8.3
9_SX3  (via drill 0.35)
  Top 0.2: v37.74,46.35 37.74,47.45 R32.1 | v39.04,35.75 39.04,33.95 38.19,33.1 | 38.19,33.1 38.14,33.05 38.14,31.55 38.04,31.45 SW1.16 | 38.19,33.1 v38.04,33.25
  Bottom 0.2: v37.74,46.35 37.74,45.05 39.04,43.75 v39.04,35.75 | v38.04,33.25 33.34,33.25 30.84,30.75 30.84,30.15 31.44,29.55 31.44,27.55 30.64,26.75 29.64,26.75 28.44,27.95 27.64,27.95 U$3.9
10_SX1  (via drill 0.35)
  Top 0.2: v67.04,19.45 67.24,19.25 67.24,18.55 M_01.6 | v26.74,63.55 26.74,65.35 29.54,68.15 U$1.10
  Bottom 0.2: 41.24,17.55 41.55,17.55 | 41.55,17.55 42.14,17.55 51.94,27.35 59.78,27.35 67.04,20.09 v67.04,19.45 | v26.74,63.55 25.14,65.15 17.44,65.15 14.34,68.25 7.63,68.25 4.94,65.56 4.94,41.35 27.19,19.1 28.85,19.1 29.2,18.75 29.93,18.75 30.33,19.15 39.74,19.15 41.29,17.61 41.5,17.61 41.55,17.55
10_SX2  (via drill 0.35)
  Top 0.2: v56.94,111.75 53.64,108.45 31.84,108.45 30.24,110.05 U$2.10 | 67.34,98.45 M_05.6 67.27,98.8 67.82,99.35 67.82,107.67 v67.34,108.15
  Bottom 0.2: v67.34,108.15 67.34,108.55 67.84,109.05 67.84,114.95 66.64,116.15 61.34,116.15 v56.94,111.75
10_SX3  (via drill 0.35)
  Top 0.2: v35.14,46.35 35.14,47.45 R33.1 | v33.94,35.75 33.94,34.45 33.99,34.4 | 33.99,34.4 35.34,33.05 35.34,31.55 35.44,31.45 SW1.15 | v33.94,34.35 33.99,34.4
  Bottom 0.2: v35.14,46.35 35.14,46.22 33.94,45.02 v33.94,35.75 | v33.94,34.35 30.74,34.35 30.24,33.85 30.24,28.05 U$3.10
11_SX1  (via drill 0.35)
  Top 0.2: v68.64,18.05 68.14,17.55 67.34,17.55 M_01.5 | v62.14,34.85 v65.24,31.75 | v36.64,66.05 v43.74,66.05
  Bottom 0.2: v68.64,18.05 68.64,28.35 v65.24,31.75 | v36.64,66.05 34.34,66.05 32.24,68.15 U$1.11 | v62.14,34.85 60.87,34.85 54.74,40.98 54.74,43.32 47.34,50.72 47.34,55.15 47.24,55.25 47.24,58.75 47.34,58.85 47.34,59.84 46.7,60.48 46,60.48 44.73,61.75 44.73,65.07 v43.74,66.05
11_SX2  (via drill 0.35)
  Top 0.2: U$2.11 32.74,110.05 33.94,108.85 53.48,108.85 55.24,110.62 v55.24,111.05 | 66.75,97.41 M_05.5 67.24,97.45 66.64,97.45 66.2,97.9 66.2,98.83 66.38,99.01 66.85,99.01 67.42,99.58 67.42,105.67 v66.14,106.95
  Bottom 0.2: v66.14,106.95 66.14,107.95 67.44,109.25 67.44,110.25 66.64,111.05 v55.24,111.05
11_SX3  (via drill 0.35)
  Top 0.2: v32.54,46.35 32.54,47.45 R34.1 | v30.34,35.55 32.84,33.05 32.84,31.45 SW1.14 32.94,31.35 33.14,31.15 33.14,29.65 32.94,29.45 32.94,29.05 32.74,28.85 32.74,28.05 U$3.11
  Bottom 0.2: v32.54,46.35 32.54,44.95 31.44,43.85 31.44,42.37 30.34,41.27 v30.34,35.55
12_SX1  (via drill 0.35)
  Top 0.2: v68.64,16.55 67.34,16.55 M_01.4 | v62.84,32.15 v64.24,30.75 | 44.54,60.75 44.73,60.75 | 44.73,60.75 v44.74,60.75 | v42.94,62.35 42.94,60.95 43.46,60.43 44.41,60.43 44.73,60.75
  Bottom 0.2: v68.64,16.55 68.64,17.05 67.74,17.95 67.74,18.62 68.22,19.1 68.22,28.2 65.68,30.75 v64.24,30.75 | v62.84,32.15 54.34,40.65 54.34,43.15 45.04,52.45 45.04,55.75 45.44,56.15 45.44,58.55 44.74,59.25 v44.74,60.75 | v42.94,62.35 37.14,68.15 U$1.12
12_SX2  (via drill 0.35)
  Top 0.2: v42.24,114.55 37.84,110.15 U$2.12 | M_05.4 67.34,96.45 67.84,96.45 68.44,97.05 68.44,98.84 68.3,98.99 68.3,99.04 68.22,99.11 68.22,108.79 68.78,109.35 68.78,121.61 v68.44,121.95
  Bottom 0.2: v68.44,121.95 66.24,124.15 54.84,124.15 53.54,122.85 50.54,122.85 v42.24,114.55
12_SX3  (via drill 0.35)
  Top 0.2: v29.74,46.35 30.04,46.65 30.04,47.45 R35.1 | v28.44,34.85 30.24,33.05 30.24,31.55 30.34,31.45 SW1.13 30.44,31.35 30.44,31.15 30.94,30.65 31.34,30.65 v31.54,30.45
  Bottom 0.2: v29.74,46.35 28.94,46.35 26.34,43.75 26.34,42.67 28.44,40.57 v28.44,34.85 | v31.54,30.45 34.64,30.45 37.04,28.05 37.74,28.05 U$3.12
13_SX1  (via drill 0.35)
  Top 0.2: v67.84,59.75 67.34,59.25 67.34,58.35 M_03.6 | v44.14,73.15 44.14,72.55 39.84,68.25 U$1.13
  Bottom 0.2: v44.14,73.15 51.94,80.95 54.94,80.95 58.95,76.94 58.95,75.24 57.08,73.36 57.08,70.18 67.51,59.75 v67.84,59.75
13_SX2
  Top 0.2: M_07.6 67.24,138.85 65.44,138.85 59.54,144.75 40.44,144.75 39.64,143.95 39.64,132.95 46.64,125.95 46.64,116.45 40.34,110.15 U$2.13
13_SX3  (via drill 0.35)
  Top 0.2: v27.14,46.35 27.44,46.65 27.44,47.45 R36.1 | v26.14,34.85 26.14,34.55 27.39,33.3 | 27.39,33.3 27.64,33.05 27.64,31.65 SW1.12 | v27.34,33.25 27.39,33.3
  Bottom 0.2: v27.14,46.35 26.34,46.35 23.74,43.75 23.74,37.25 v26.14,34.85 | U$3.13 40.24,27.95 39.54,27.95 37.94,26.35 27.44,26.35 26.31,27.49 26.31,28.53 25.58,29.26 25.05,29.26 25.04,29.26 25.04,31.17 26.35,32.47 26.63,32.47 27.02,32.87 27.02,32.93 v27.34,33.25
14_SX1  (via drill 0.35)
  Top 0.2: v68.64,57.35 67.34,57.35 M_03.5 | v54.04,68.95 v55.24,70.15
  Bottom 0.2: v55.24,70.15 56.54,70.15 66.24,60.45 66.24,59.32 68.21,57.35 v68.64,57.35 | v54.04,68.95 53.74,68.95 53.04,68.25 49.24,68.25 47.94,69.55 43.64,69.55 42.34,68.25 U$1.14
14_SX2  (via drill 0.35)
  Top 0.2: v60.74,123.45 60.74,125.45 63.34,128.05 63.61,128.05 67.31,131.75 68.34,131.75 68.48,131.61 70.52,131.61 70.66,131.75 70.74,131.75 70.74,134.85 67.84,137.75 67.34,137.75 M_07.5 | v47.34,114.55 42.94,110.15 U$2.14
  Bottom 0.2: v60.74,123.45 59.24,123.45 53.54,117.75 50.54,117.75 v47.34,114.55
14_SX3  (via drill 0.35)
  Top 0.2: v23.84,47.15 24.14,47.45 24.84,47.45 R37.1 | v24.64,33.55 25.14,33.05 25.14,31.55 25.24,31.45 SW1.11 | v44.24,26.65 44.14,26.75 44.14,26.95 43.14,27.95 42.94,27.95 U$3.14
  Bottom 0.2: v23.84,47.15 23.84,45.05 22.94,44.15 22.94,35.25 24.09,34.1 | v24.64,33.55 24.09,34.1 | v44.24,26.65 43.84,26.65 42.74,25.55 26.98,25.55 25.75,26.78 24.56,26.78 23.34,27.99 19.5,27.99 18.74,28.75 18.74,29.85 19.44,30.55 20.54,30.55 24.09,34.1
15_SX1  (via drill 0.35)
  Top 0.2: v67.84,52.35 69.34,53.85 69.34,54.95 68.04,56.25 67.34,56.25 M_03.4
  Bottom 0.2: v67.84,52.35 67.84,56.55 65.44,58.95 65.44,60.05 58.54,66.95 46.14,66.95 44.94,68.15 U$1.15
15_SX2  (via drill 0.35)
  Top 0.2: v65.34,138.15 66.64,136.85 67.24,136.85 M_07.4 | v47.34,128.05 47.34,127.75 49.24,125.85 49.24,113.95 45.44,110.15 U$2.15
  Bottom 0.2: v65.34,138.15 65.34,138.95 59.54,144.75 52.34,144.75 47.34,139.75 47.34,137.15 47.24,137.05 47.24,133.45 47.34,133.35 v47.34,128.05
15_SX3  (via drill 0.35)
  Top 0.2: v68.14,74.15 67.94,73.95 67.94,73.05 R28.2
  Bottom 0.2: v68.14,74.15 68.14,73.75 70.34,71.55 70.34,37.85 70.3,37.85 61.4,28.95 54.58,28.95 53.38,27.75 49.44,27.75 48.44,26.75 46.64,26.75 45.44,27.95 U$3.15
CAN_RX2
  Top 0.2: JP2.2 13.24,122.45 13.24,122.05 15.74,119.55 JP3.4
  Bottom 0.2: CONN01.4 5.74,119.85 6.54,119.85 7.74,118.65 14.94,118.65 15.74,119.45 JP3.4
CAN_TX2
  Top 0.2: 15.89,118 16.94,119.05 16.94,121.25 15.74,122.45 JP2.1 | 15.89,118 15.84,117.95 15.84,117.05 JP3.3 | CONN01.3 8.34,119.85 13.74,119.85 15.54,118.05 15.84,118.05 15.89,118
GND_MCU  (via drill 0.35)
  Top 0.2: 35.99,19.9 38.74,22.65 40.84,22.65 R1.1 40.94,22.75 42.04,23.85 43.54,23.85 43.64,23.75 | 35.99,19.9 33.84,17.75 33.84,17.65 29.54,13.35 27.24,13.35 M_02.1 | 35.99,19.9 42.84,13.05 42.84,11.65 47.04,7.45 59.54,7.45 65.54,13.45 67.24,13.45 M_01.1 67.34,13.55 67.84,13.55 69.34,15.05 69.34,18.35 68.94,18.75 68.54,18.75 68.24,19.05 68.24,19.25 67.14,20.35 67.14,51.05 | 67.14,51.05 67.14,52.65 67.24,52.75 67.24,53.25 M_03.1 | 43.64,23.75 44.54,22.85 45.34,22.85 R9.1 | 43.64,23.75 47.84,27.95 U$3.GND_1 47.94,28.05 47.94,28.95 51.74,32.75 51.74,35.65 52.94,36.85 U$3.GND_3 52.94,36.95 49.94,39.95 48.24,39.95 SW1.1 | 4.79,23.9 5.94,22.75 R10.1 | 4.79,23.9 4.74,23.95 2.84,23.95 2.64,23.75 2.64,23.65 1.84,22.85 R2.1 | v13.04,36.85 4.84,28.65 4.84,23.95 4.79,23.9 | 47.94,40.05 SW1.2 45.54,40.05 43.14,40.05 SW1.3 43.04,40.05 40.64,40.05 SW1.4 38.04,40.05 SW1.5 37.94,40.05 35.54,40.05 SW1.6 35.44,40.05 SW1.7 32.84,40.05 32.34,40.05 31.39,41 | 47.94,40.05 48.14,40.05 SW1.1 | 47.94,40.05 U$3.GND_2 | 47.94,40.05 SW1.1 | v31.14,48.15 31.14,44.05 31.44,43.75 31.44,41.05 31.39,41 | 31.39,41 30.44,40.05 SW1.8 30.34,40.05 27.94,40.05 SW1.9 25.34,40.05 SW1.10 25.24,39.95 23.84,38.55 v23.84,32.85 | M_04.1 27.24,53.25 27.24,52.15 29.04,50.35 v29.74,50.35 30.74,50.35 35.64,55.25 v38.74,55.25 | v39.84,56.65 39.84,63.45 R3.1 | v21.64,30.65 21.64,34.55 20.04,36.15 20.04,36.85 U$3.GND | CONN02.9 66.14,112.25 66.14,109.85 CONN02.11 66.04,109.85 65.44,109.85 64.04,108.45 61.24,108.45 v61.14,108.55 | v46.24,107.75 46.24,103.65 R13.1 | 49.64,112.65 49.64,111.85 47.94,110.15 U$2.GND_1
  Top 0.2: 49.64,112.65 49.64,114.95 52.94,118.25 52.94,118.95 U$2.GND_3 52.94,119.05 52.94,119.85 49.64,123.15 49.64,126.75 47.64,128.75 47.04,128.75 45.79,127.5 | v59.34,110.35 57.04,112.65 49.64,112.65 | R16.1 44.84,143.15 43.74,144.25 41.84,144.25 40.74,143.15 R7.1 40.64,143.05 40.64,139.85 40.54,139.75 40.54,135.65 42.84,133.35 42.84,130.45 45.79,127.5 | v59.14,125.45 67.24,133.55 67.24,133.75 M_07.1 | 45.79,127.5 47.84,125.45 U$2.GND_2 | R8.1 2.14,143.25 3.24,144.35 5.34,144.35 6.44,143.25 R17.1 6.54,143.25 v8.04,144.75 | v23.94,122.15 26.34,124.55 26.34,125.95 27.14,126.75 27.14,133.75 M_08.1 27.04,133.75 26.84,133.95 v25.74,133.95 | U$2.GND 19.94,118.95 15.84,114.85 15.84,114.45 JP3.2 15.74,114.35 v10.34,114.35 | R11.1 44.54,63.45 44.54,65.25 47.44,68.15 U$1.GND_1 48.29,68.25 48.54,68 49.17,68.63 v49.17,70.54 | v66.34,92.45 67.24,93.35 M_05.1 | 66.34,77.65 66.34,76.35 66.24,76.25 STATUS_LED.2 66.14,76.15 65.24,75.25 65.24,73.15 59.94,67.85 v57.24,67.85 | 66.34,77.65 62.94,77.65 61.74,76.45 60.54,76.45 POWE_3.3.2 60.44,76.45 58.14,78.75 54.84,78.75 53.24,77.15 52.54,77.15 U$1.GND_3 52.48,77.93 51.24,79.17 51.24,80.19 52.02,80.98 52.99,80.98 53.72,81.71 53.72,83.14 v51.08,85.78 | 66.34,77.65 v66.34,77.85 | 3.69,65.1 3.74,65.15 5.94,65.15 6.94,64.15 R12.1 | 3.69,65.1 3.64,65.05 3.64,64.95 2.74,64.05 R4.1 | 3.69,65.1 2.24,66.55 2.24,75.65 3.34,76.75 R22.1 3.44,76.85 v10.04,83.45 | 5.34,103.35 6.74,103.35 R14.1 | 5.34,103.35 R6.1 | v5.34,105.25 5.34,103.35 | v5.34,106.95 8.24,109.85 CONN01.11 8.24,109.95 8.24,112.25 CONN01.9 | v29.94,93.35 27.24,93.35 M_06.1
  Top 0.2: U$1.GND_2 47.34,83.55 40.54,90.35 40.54,99.55 41.94,100.95 41.94,103.55 R5.1 41.84,103.55 41.34,104.05 v40.74,104.05 | v13.94,86.85 13.94,83.35 19.44,77.85 U$1.GND | 48.24,82.65 47.44,83.45 U$1.GND_2 | 67.14,51.05 70.54,51.05 70.74,51.25 70.74,69.55 v69.04,71.25 | U$1.GND_2 45.11,85.78 v43.46,85.78 | v45.36,80.06 v45.36,71.17
  Bottom 0.2: v13.04,36.85 14.54,38.35 18.54,38.35 19.94,36.95 U$3.GND | v29.74,50.35 29.74,49.55 v31.14,48.15 | v39.84,56.65 39.84,56.35 v38.74,55.25 | v23.84,32.85 v21.64,30.65 | U$2.GND_1 47.84,110.05 46.24,108.45 v46.24,107.75 44.44,107.75 v40.74,104.05 | v59.34,110.35 v61.14,108.55 | v59.14,125.45 47.94,125.45 U$2.GND_2 | v23.94,122.15 23.14,122.15 20.04,119.05 U$2.GND | v8.04,144.75 19.54,144.75 25.74,138.55 v25.74,133.95 | v66.34,92.45 v66.34,77.85 66.34,74.35 69.04,71.65 v69.04,71.25 | v57.24,67.85 49.04,67.85 48.74,68.15 47.44,68.15 U$1.GND_1 | v5.34,106.95 v5.34,105.25 5.34,95.45 7.94,92.85 7.94,91.85 12.89,86.9 | U$1.GND_2 47.34,83.55 43.54,87.35 35.94,87.35 v29.94,93.35 30.04,93.15 24.34,87.45 14.94,87.45 14.34,86.85 v13.94,86.85 12.94,86.85 12.89,86.9 | v10.04,83.45 10.04,84.05 12.89,86.9 | v47.61,74.98 49.68,77.05 52.44,77.05 U$1.GND_3 | v10.34,114.35 8.34,112.35 CONN01.9 | v45.36,80.06 43.46,81.97 43.46,82.88 43.56,82.98 43.56,84 43.46,84.1 v43.46,85.78 | v45.36,71.17 46,70.54 v49.17,70.54
  other vias: 39.01,3.86 31.39,55.93 47.9,25.45 26.95,78.16 40.92,118.8 23.14,103.56 10.44,29.9 61.24,43.23 31.39,64.19 5.99,127.69 48.54,64.19 42.82,97.21 27.58,73.71 20.6,68 3.45,135.31 28.22,101.65 46.63,88.95 25.68,36.88 8.53,69.9 14.25,66.73 32.66,36.88 28.85,33.07
  pour Top: -16.97,153.11 108.15,153.11 108.15,-12.5 -16.97,-12.5
  pour Bottom: -11.94,157.91 113.31,157.91 113.31,-9.7 -11.94,-9.7
INT_01  (via drill 0.35)
  Top 0.2: v7.34,106.95 9.54,109.15 9.54,112.85 8.84,113.55 5.14,113.55 4.44,114.25 4.44,116.15 5.64,117.35 CONN01.6
  Bottom 0.2: v7.34,106.95 8.14,106.15 25.25,106.15 33.45,97.95 33.82,97.95 35.8,95.98 35.8,95.65 36.19,95.26 36.76,95.26 36.8,95.3 42.6,95.3 44.51,93.4 44.51,88.54 46,87.05 47.65,87.05 U$1.INT 52.44,82.25
INT_02
  Bottom 0.2: CONN01.5 8.34,117.35 8.64,117.35 17.54,108.45 19.84,108.45 20.74,109.35 20.74,109.55 34.84,123.65 52.54,123.65 52.94,124.05 U$2.INT
N$13
  Top 0.2: R28.1 66.24,73.05 66.24,73.95 66.74,74.45 67.24,74.45 68.54,75.75 69.04,75.75 69.44,76.15 STATUS_LED.1
N$193
  Top 0.2: R27.1 61.84,72.95 61.84,73.85 63.74,75.75 63.74,76.35 POWE_3.3.1
NEOPIXEL_01  (via drill 0.35)
  Top 0.2: v68.64,15.55 67.34,15.55 M_01.3 | v68.94,37.45 v69.94,36.45 | v69.34,108.95 69.34,123.05 68.04,124.35 65.44,124.35 63.64,122.55 CONN02.2
  Bottom 0.2: v69.34,108.95 69.34,96.05 67.44,94.15 67.44,73.85 69.94,71.35 69.94,38.45 v68.94,37.45 | v69.94,36.45 67.59,34.1 67.59,29.97 69.32,28.24 69.32,16.27 68.93,15.87 68.36,15.87 67.67,16.57 67.63,16.57 v68.64,15.55
NEOPIXEL_02  (via drill 0.35)
  Top 0.2: v29.24,14.05 27.94,15.35 27.24,15.35 M_02.3
  Bottom 0.2: v29.24,14.05 35.84,7.45 65.99,7.45 70.74,12.21 70.74,117.95 66.24,122.45 CONN02.1
NEOPIXEL_03  (via drill 0.35)
  Top 0.2: v68.64,54.55 67.94,55.25 67.34,55.25 M_03.3 | v48.94,86.75 49.28,86.41 49.28,76.03 51.31,74.01 51.66,73.66 51.66,73 51.24,72.57 51.24,69.01 51.71,68.53 51.71,66.48 v51.94,66.25
  Bottom 0.2: v68.64,54.55 68.64,52.15 68.14,51.65 67.59,51.65 | 67.54,51.65 67.59,51.65 | v51.94,66.25 58.64,66.25 65.04,59.85 65.04,58.78 67.43,56.4 67.43,52.89 67.17,52.63 67.17,52.07 67.56,51.67 67.57,51.67 67.59,51.65 | v48.94,86.75 58.84,86.75 68.24,96.15 68.24,117.15 66.74,118.65 64.84,118.65 63.64,119.85 CONN02.4
NEOPIXEL_04  (via drill 0.35)
  Top 0.2: 26.54,55.35 27.14,55.35 M_04.3 26.77,55.71 26.28,55.71 25.57,56.42 25.57,59.6 23.14,62.03 23.14,63.89 23.42,64.17 23.42,64.73 22.9,65.25 22.9,72.21 26.34,75.64 v30.15,75.64 v30.14,75.65 | v51.74,83.95 v50.74,82.95
  Bottom 0.2: v30.14,75.65 43.44,75.65 v50.74,82.95 | CONN02.3 66.78,119.3 68.64,117.6 68.64,95.95 59.04,86.35 54.14,86.35 v51.74,83.95
NEOPIXEL_05
  Top 0.2: 66.64,95.45 67.24,95.45 M_05.3 66.87,95.81 66.38,95.81 65.8,96.39 65.8,99 66.21,99.41 66.69,99.41 67.02,99.75 67.02,105.46 66.21,106.27 65.86,106.27 65.44,106.69 65.44,107.25 68.08,109.89 68.08,114.72 66.64,116.15 64.84,116.15 63.64,117.35 CONN02.6
NEOPIXEL_06  (via drill 0.35)
  Top 0.2: v21.84,112.75 22.14,112.45 22.14,108.15 24.84,105.45 24.84,97.95 25.04,97.75 25.04,96.95 26.54,95.45 27.14,95.45 M_06.3 | v67.74,123.65 67.74,118.95 66.24,117.45 CONN02.5
  Bottom 0.2: v67.74,123.65 64.74,126.65 34.74,126.65 33.94,125.85 33.94,123.92 22.78,112.75 v21.84,112.75
NEOPIXEL_07
  Top 0.2: M_07.3 67.34,135.75 67.84,135.75 68.44,135.15 68.44,133.45 63.44,128.45 63.18,128.45 60.34,125.62 60.34,124.01 60.07,123.73 60.07,123.17 60.2,123.03 60.2,118.29 63.54,114.95 CONN02.8
NEOPIXEL_08  (via drill 0.35)
  Top 0.2: v28.64,135.75 27.24,135.75 M_08.3 | CONN02.7 66.14,114.95 65.44,114.95 64.24,116.15 63.04,116.15 60.6,118.59 60.6,122.61 60.77,122.77 61.03,122.77 61.42,123.17 61.42,123.73 61.14,124.01 61.14,125.28 62.91,127.05 63.34,127.05 v63.64,127.35
  Bottom 0.2: v28.64,135.75 29.94,135.75 38.64,127.05 62.51,127.05 62.81,127.35 v63.64,127.35
SCL_00  (via drill 0.35)
  Top 0.2: U$2.SCL 20.04,111.35 20.04,109.65 v21.44,108.25 24.44,105.25 24.44,97.75 24.64,97.55 24.64,92.55 20.64,88.55 v20.64,84.85
  Bottom 0.2: U$3.SCL 20.04,29.35 21.54,29.35 26.34,34.15 29.94,34.15 30.54,34.75 33.39,34.75 33.66,35.03 34.23,35.03 35.2,34.05 37.28,34.05 37.58,34.35 46.1,34.35 51.1,29.35 52.94,29.35 U$3.SCL_2 53.04,29.35 61.04,29.35 68.27,36.57 68.27,37.73 68.66,38.13 68.89,38.13 69.54,38.79 69.54,55.45 65.84,59.15 65.84,60.25 56.64,69.45 54.94,69.45 53.69,70.7 | 18.68,73.09 18.14,72.55 18.14,71.55 19.44,70.25 19.44,69.55 U$1.SCL | 53.69,70.7 52.54,69.55 U$1.SCL_2 | 53.69,70.7 53.74,70.75 53.74,72.55 52.94,73.35 51.94,73.35 51.04,72.45 20.82,72.45 20.71,72.56 | CONN01.2 5.74,122.55 6.54,122.55 7.74,123.75 9.07,123.75 11.77,121.05 16.44,121.05 18.74,118.75 18.74,118.45 19.44,117.75 20.54,117.75 21.24,117.05 21.24,113.15 20.04,111.95 20.04,111.45 U$2.SCL | 28.94,111.95 28.97,111.93 | 28.97,111.93 29.44,111.45 52.94,111.45 U$2.SCL_2 | v20.64,84.85 20.74,84.75 20.71,84.72 20.71,72.56 | 18.94,73.3 19.97,73.3 20.71,72.56 | 18.94,73.3 | 18.73,73.09 18.68,73.09 | 18.68,73.09 18.94,73.35 18.94,73.3 | 28.97,111.93 28.93,111.93 28.73,112.13 24.45,112.13 22.12,109.8 22.12,108.97 21.44,108.29 v21.44,108.25
SDA_00  (via drill 0.35)
  Top 0.2: v21.44,109.25 21.44,112.15 20.04,113.55 20.04,113.85 U$2.SDA 18.55,113.94 17.42,112.82 17.42,106.87 v19.34,104.95 | v13.84,38.65 v14.84,37.65 | v15.84,65.75 18.14,68.05 18.14,70.75 U$1.SDA 19.54,72.15 21.34,73.95 21.34,85.45 v24.64,88.75
  Bottom 0.2: 19.94,114.75 19.94,114.35 | 19.94,114.35 19.94,113.95 U$2.SDA | 8.34,122.45 CONN01.1 9.81,122.45 11.61,120.65 16.24,120.65 18.34,118.55 18.34,118.28 18.69,117.93 18.69,115.6 19.94,114.35 | v14.84,37.65 19.94,32.55 19.94,31.85 U$3.SDA | v13.84,38.65 13.84,45.95 7.64,52.15 7.64,53.55 7.24,53.95 7.24,58.55 7.84,59.15 7.84,63.05 10.54,65.75 v15.84,65.75 | 35.84,72.05 19.54,72.05 U$1.SDA | 35.84,72.05 52.44,72.05 U$1.SDA_2 | U$3.SDA_2 52.94,31.85 49.54,31.85 46.24,35.15 46.24,41.08 45.31,42.02 44.88,42.02 44.15,42.74 44.15,43.77 44.73,44.35 44.73,46.01 44.24,46.49 44.24,47.53 44.09,47.68 44.09,56 44.04,56.05 44.04,64.75 41.02,67.78 41.02,68.76 40.29,69.49 37.11,69.49 35.84,70.76 35.84,72.05 | v19.34,104.95 24.64,99.65 v24.64,88.75 | 52.37,113.31 U$2.SDA_2 53.01,113.15 52.51,112.64 52.5,112.64 51.77,111.92 51.77,111.91 51.71,111.85 29.61,111.85 28.93,112.53 | 28.88,112.58 28.93,112.53 | 28.93,112.53 24.29,112.53 21.44,109.68 v21.44,109.25
VCC_5V  (via drill 0.35)
  Top 0.45: S1.8 33.24,99.81 | 33.24,99.81 32.5,99.06 32.04,99.06 30.76,97.78 30.76,95.94 | 30.76,95.94 29.23,94.41 M_06.2 | M_05.2 67,94.14 66.32,94.14 66.07,93.89 66.07,93.84 59.94,87.71 | v49.17,90.22 49.42,90.22 52.27,87.37 59.6,87.37 59.94,87.71 | v36.47,95.94 35.15,97.26 35.15,98.81 34.9,99.06 34.45,99.06 S1.8 | M_08.2 25.18,134.81 24.45,134.08 24.45,132 23.14,130.69 23.14,109.91 33.24,99.81 | M_07.2 67,134.54 66.32,134.54 66.07,134.29 66.07,133.61 57.44,124.98 57.44,117.54 v57.43,117.53 | v34.57,103.56 33.47,102.46 S1.8 | 66.07,54.83 66.32,54.59 67,54.59 M_03.2 | 66.07,54.83 66.07,69.54 70.67,74.14 70.67,77.24 70.31,77.6 70.05,77.6 59.94,87.71 | 30.76,95.94 30.76,88.32 28.85,86.41 23.14,86.41 21.87,85.14 21.87,62.56 25.04,59.38 25.04,54.66 | 25.04,54.66 25.39,54.31 M_04.2 | M_01.2 67,14.79 66.32,14.79 66.07,15.03 66.07,54.83 | M_02.2 26.9,14.69 26.22,14.69 25.97,14.93 25.97,18.4 22.5,21.87 v22.5,47.04 | 25.04,54.66 25.04,52.76 v23.77,51.49
  Bottom 0.45: v34.57,103.56 35.4,102.73 36.92,102.73 37.98,101.67 48.17,101.67 52,105.49 53.02,105.49 54.25,106.73 54.25,110.72 54.37,110.84 54.37,111.93 57.43,114.99 v57.43,117.53 | v22.5,47.04 22.5,50.22 v23.77,51.49 | v49.17,90.22 47.47,91.93 47.47,93.19 44.73,95.94 v36.47,95.94
VCC_5V_IN  (via drill 0.35)
  Top 0.45: v36.47,98.48 36.91,98.04 S1.3
  Bottom 0.45: CONN01.12 8.74,106.73 25.41,106.73 33.67,98.48 v36.47,98.48 39.01,101.02 48.44,101.02 52.27,104.84 58.67,104.84 CONN02.12

## Text on the board
tPlace: gnd | gnd | 0 | 0 | 1 | 1 | 2 | 2 | 3 | 3 | Power | - | - | 4 | 5 | 4 | 5 | gnd | gnd | 6 | 6 | 7 | 7
bPlace: SX_02 | I2C | 5V | 5V | NEO | SX_01 | SX_03
Document: I2C | NEO | 3.3V | 5V | GND | 5V | GND